# EAGLE board PCB1 (EAGLE 8.6.0)
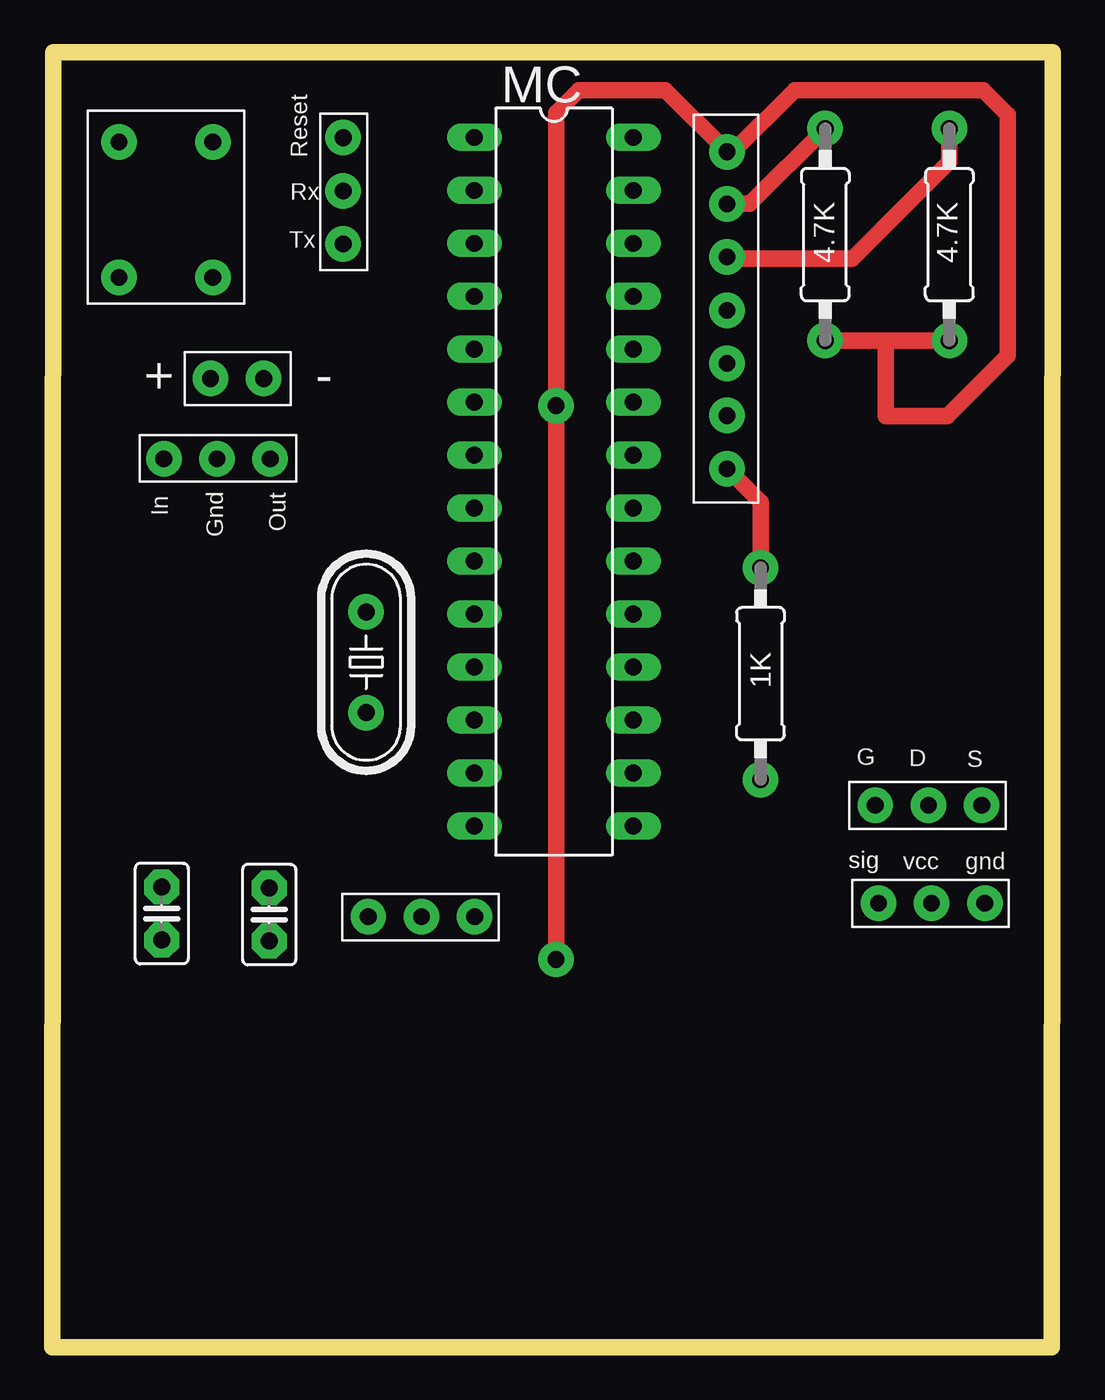
[diagram p0: board, top side]
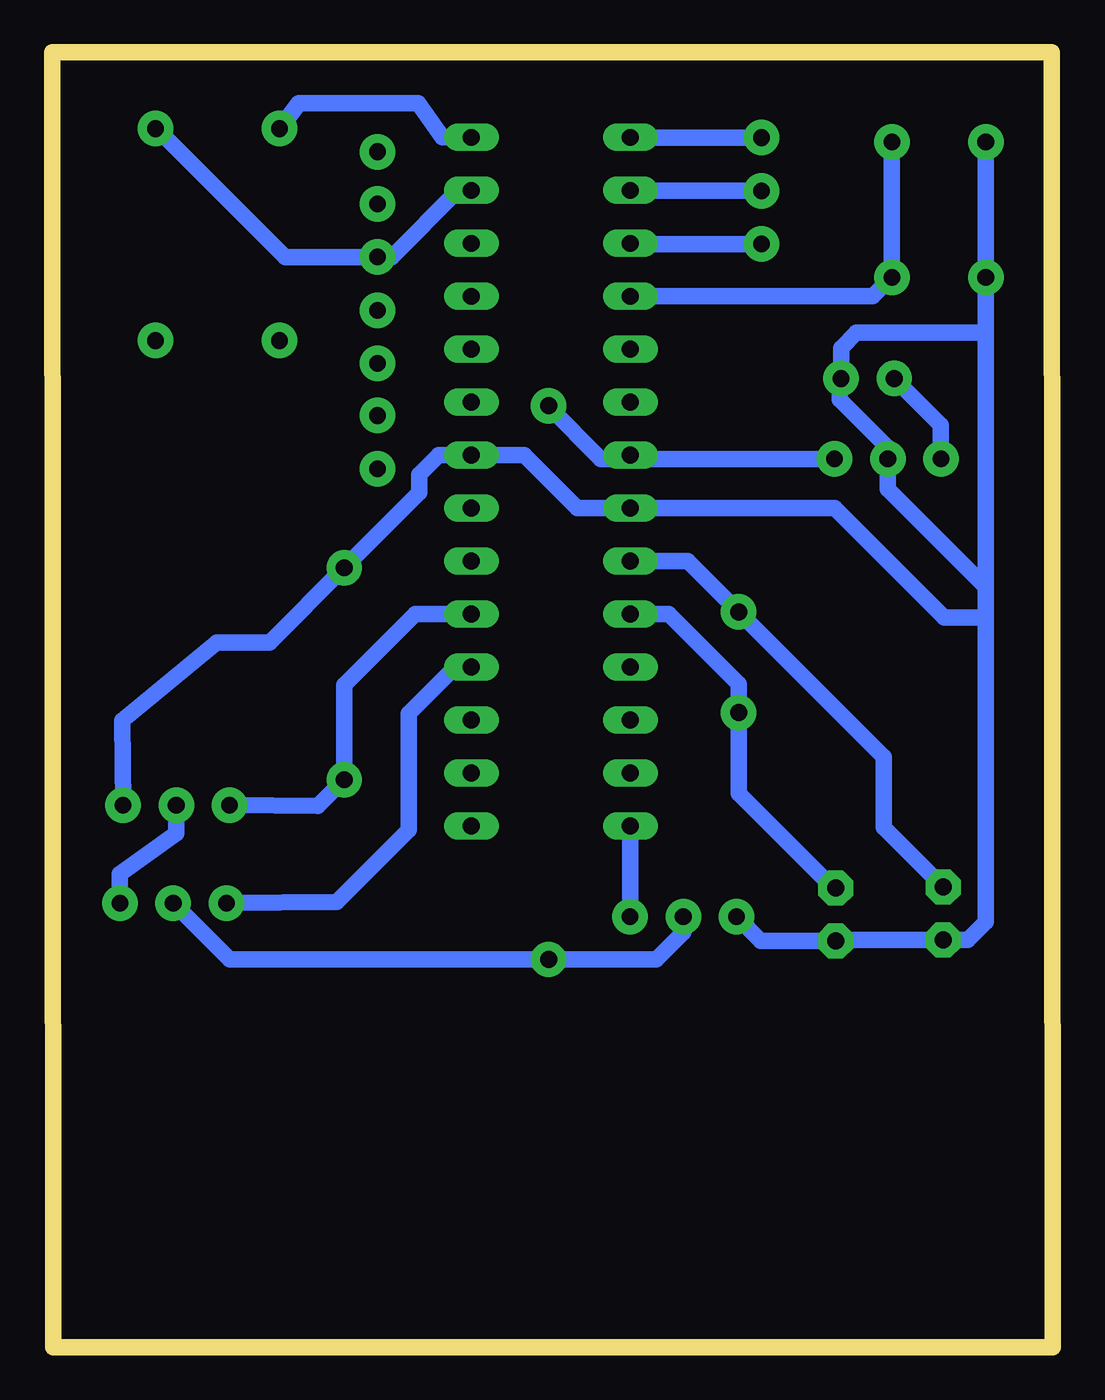
[diagram p1: board, bottom side, seen from below]

Size 47.95 x 62.1 mm. Coordinates in mm from the lower left corner, seen from the top.
Outline: 0.05,62.1 0,0 47.9,0 47.95,62.1 0.05,62.1
Copper layers (1*16): Top 0.035mm / dielectric 1.5mm / Bottom 0.035mm
Design rules "default": minimum track width 6mil, minimum drill 0.35mm, track to track 6mil, track to pad 6mil, pad to pad 6mil, via to via 6mil, smd to smd 6mil, copper to edge 40mil, drill to drill 6mil, minimum pad ring 10mil, minimum via ring 8mil, stop-mask expansion 4mil, vias tented up to drill 0mil, thermal gap 10mil

## Footprints (pad centres in the part's own frame; a part is rotated, then mirrored left to right if it is on the bottom)
PIN_HEADER_2X1_GP = drill 0.8 pad 1.7: P$1 -1.31,0; P$2 1.24,0
PIN_HEADER_3X1_GP = drill 0.8 pad 1.7: P$1 0,0; P$2 2.55,0; P$3 -2.55,0
PIN_HEADER_7X1_GP = drill 0.8 pad 1.7: P$1 -3.825,0; P$2 -1.275,0; P$3 1.275,0; P$4 3.825,0; P$5 6.325,0; P$6 -6.325,0; P$7 -8.875,0
0207/10 = drill 0.8 pad 1.7: 1 -5.08,0; 2 5.08,0
C025-025X050 = drill 0.813 pad 1.676 octagon: 1 -1.27,0; 2 1.27,0
HC49/S = drill 0.813 pad 1.7: 1 -2.413,0; 2 2.413,0
PUSH_BUTTON = drill 0.8 pad 1.7: P$1 -2.25,3.25; P$2 2.25,3.25; P$3 2.25,-3.25; P$4 -2.25,-3.25
DIL28-3$ = drill 0.813 long: 1 -16.51,-3.81; 2 -13.97,-3.81; 3 -11.43,-3.81; 4 -8.89,-3.81; 5 -6.35,-3.81; 6 -3.81,-3.81; 7 -1.27,-3.81; 8 1.27,-3.81; 9 3.81,-3.81; 10 6.35,-3.81; 11 8.89,-3.81; 12 11.43,-3.81; 13 13.97,-3.81; 14 16.51,-3.81; 15 16.51,3.81; 16 13.97,3.81; 17 11.43,3.81; 18 8.89,3.81; 19 6.35,3.81; 20 3.81,3.81; 21 1.27,3.81; 22 -1.27,3.81; 23 -3.81,3.81; 24 -6.35,3.81; 25 -8.89,3.81; 26 -11.43,3.81; 27 -13.97,3.81; 28 -16.51,3.81

## Placement (x,y rotation side)
E$3  [PIN_HEADER_2X1_GP]  8.9,46.45 0 top
E$4  [PIN_HEADER_3X1_GP]  17.7,20.65 0 top
E$12  [PIN_HEADER_3X1_GP]  42,26 0 top
E$13  [PIN_HEADER_3X1_GP]  42.15,21.3 0 top
E$14  [PIN_HEADER_3X1_GP]  7.9,42.6 180 top
E$15  [PIN_HEADER_3X1_GP]  13.95,55.45 90 top
E$16  [PIN_HEADER_7X1_GP]  32.35,51 90 top
E$17  [0207/10]  37.05,53.35 270 top
E$18  [0207/10]  43,53.35 270 top
E$19  [0207/10]  33.95,32.3 90 top
E$20  [C025-025X050]  10.4,20.75 270 top
E$21  [C025-025X050]  5.25,20.8 270 top
E$22  [HC49/S]  15.05,32.85 90 top
E$23  [PUSH_BUTTON]  5.45,54.55 180 top
MC  [DIL28-3$]  24.05,41.5 270 top

## Library data of the parts
E$3 E$4 E$12-E$16 E$23 = custom components
E$17-E$22 = adafruit
MC = avr-6

## Nets
S$1: E$3.P$1 E$14.P$2
S$3: E$3.P$2 E$4.P$3 E$12.P$2 E$14.P$1 E$16.P$7 E$19.2 E$20.2 E$21.2 E$23.P$2 E$23.P$3 MC.8 MC.22
S$5: E$4.P$1 E$13.P$1 E$14.P$3 E$16.P$5 E$17.2 E$18.2 MC.7
S$8: E$21.1 E$22.2 MC.9
S$13: E$20.1 E$22.1 MC.10
S$15: E$4.P$2 MC.14
S$16: E$23.P$1 E$23.P$4 MC.4
S$17: E$15.P$2 MC.1
S$18: E$15.P$1 MC.2
S$19: E$15.P$3 MC.3
S$21: E$16.P$4 E$17.1 MC.28
S$22: E$16.P$3 E$18.1 MC.27
S$23: E$12.P$3 E$19.1 MC.19
S$25: E$12.P$1 E$13.P$2
S$26: E$13.P$3 MC.18

## Tracks (layer width: path | path; a pad name or v marks a point on that pad's centre or on a via)
S$1
  Bottom 0.8: E$14.P$2 5.35,44.21 E$3.P$1
S$3
  Top 0.8: E$16.P$7 33.95,40.52 E$19.2
  Bottom 0.8: E$12.P$2 44.6,30.05 40.05,33.8 37.53,33.8 E$19.2 30.35,40.98 30.35,41.85 29.43,42.77 MC.22 25.32,42.77 22.78,40.23 MC.8 10.43,40.23 5.2,35 3.2,35 | E$23.P$3 E$23.P$2 3.2,48.65 | 3.2,48.65 9.4,48.65 10.14,47.91 E$3.P$2 10.2,46.39 10.2,45.45 7.9,43.15 E$14.P$1 7.9,41.15 3.2,36.45 | 3.2,35 3.2,20.4 4.07,19.53 E$21.2 10.35,19.53 E$20.2 13.98,19.48 E$4.P$3 | 3.2,35 3.2,36.45 | 3.2,36.45 3.2,48.65
S$5  (via drill 0.8 pad 1.7)
  Top 0.8: v24.15,18.6 v24.15,45.15 24.15,59.2 25.23,60.28 29.39,60.28 E$16.P$5 32.62,57.33 35.58,60.28 44.62,60.28 45.8,59.1 45.8,47.55 42.9,44.65 39.95,44.65 39.95,48.27 E$18.2 E$17.2
  Bottom 0.8: 20.07,42.6 MC.7 | E$14.P$3 20.07,42.6 | E$4.P$1 17.7,19.9 19,18.6 v24.15,18.6 39.45,18.6 E$13.P$1 | 20.07,42.6 21.65,42.6 24.15,45.1 v24.15,45.15
S$8
  Bottom 0.8: MC.9 17.48,37.69 E$22.2 8.1,28.31 8.1,24.92 E$21.1
S$13
  Bottom 0.8: MC.10 18.4,35.15 15.05,31.8 E$22.1 15.05,26.55 10.52,22.02 E$20.1
S$15
  Bottom 0.8: E$4.P$2 MC.14
S$16
  Bottom 0.8: E$23.P$4 E$23.P$1 8.61,50.39 MC.4
S$17
  Bottom 0.8: E$15.P$2 MC.1
S$18
  Bottom 0.8: E$15.P$1 20.22,55.45 MC.2
S$19
  Bottom 0.8: E$15.P$3 20.21,52.9 MC.3
S$21
  Top 0.8: E$17.1 33.45,54.83 E$16.P$4
  Bottom 0.8: MC.28 29.26,58.01 30.4,59.65 36.13,59.65 E$17.1
S$22
  Top 0.8: E$18.1 43,56.85 38.35,52.2 32.42,52.2 E$16.P$3
  Bottom 0.8: MC.27 28.48,55.47 31.67,52.27 E$16.P$3 36.78,52.27 42.55,58.05
S$23
  Bottom 0.8: E$12.P$3 35.22,25.95 E$19.1 33.95,31.75 30.55,35.15 MC.19
S$25
  Bottom 0.8: E$13.P$2 44.7,22.7 42,24.65 E$12.P$1
S$26
  Bottom 0.8: E$13.P$3 34.3,21.35 30.85,24.8 30.85,30.4 28.64,32.61 MC.18

## Text on the board
tPlace: Reset | Rx | Tx | 4.7K | 4.7K | + | - | In | Gnd | Out | 1K | G | D | S | sig | vcc | gnd
209bmp: Max | push button | power | Servo